# Altium PCB Flatcaster-pcb.PcbDoc (part 2 of 2)
Units mil, origin at the board's own origin, x right, y up, seen from the top; angles counter-clockwise.
Board outline 8267.72 x 2755.91 mil, 2 copper layers (Top Layer, Bottom Layer); 203 components, 114 nets, 596 pads, 141 vias.
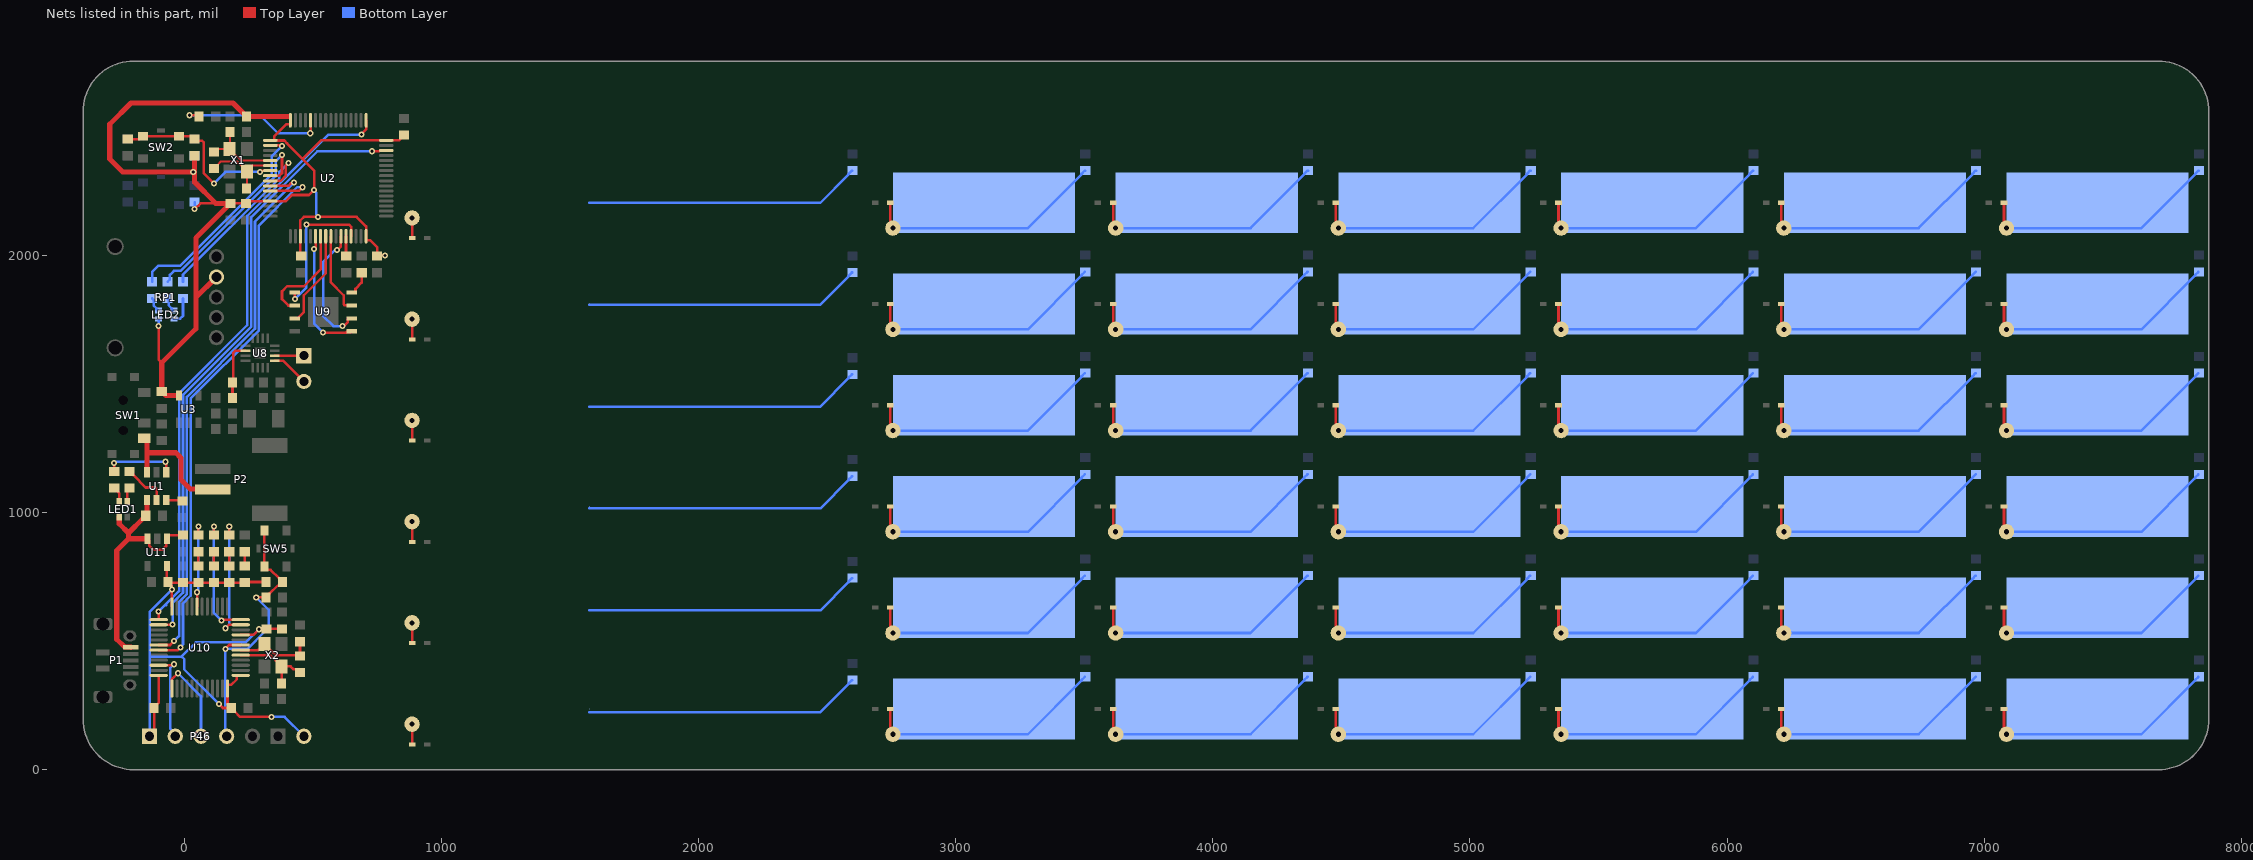
[diagram p2: the nets of this part, all layers, seen from the top]

## Via types
v1: diameter 23.62, hole 11.81, Top Layer to Bottom Layer, tented both sides, 141 vias

## Nets (pads, with @x,y where several pads share a name; then routed paths per layer and width w, separated by ;. In a path a pad name is that pad's centre, name@x,y a point inside that pad or via, vN(x,y) a via of type N, cw(c..) or ccw(c..) an arc to the next point about the centre after c; other vN are vias at no path point) (continued)
LED2_Link: D2.2 U10.11 | length 498.8
  Top Layer w10: v1(160,550) 173.58,563.58 U10.11@219.45,563.58 ; D2.2@175,912.48 v1(175,945)
  Bottom Layer w10: v1(160,550) 175,565 v1(175,945)
LED3_Link: D4.2 U10.12 | length 485.7
  Top Layer w10: D4.2@115,912.48 v1(115,945) ; v1(145,580) 148.69,580 151.95,583.27 U10.12@219.45,583.27
  Bottom Layer w10: v1(115,945) 115,610 v1(145,580)
LED4_Link: D5.2 U10.19 | length 345.2
  Top Layer w10: v1(50,690) 50,634.61 U10.19@50.16,634.45 ; D5.2@55,912.48 v1(55,945)
  Bottom Layer w10: v1(50,690) 55,695 v1(55,945)
LED_B: R22.2 U2.2 | length 833.1
  Top Layer w10: U2.2@334.61,2427.95 377.05,2427.95 v1(380,2425)
  Bottom Layer w10: R22.2@-125,1897.48 -125,1935 -100,1960 -15,1960 340,2315 340,2385 v1(380,2425)
LED_G: R21.2 U2.8 | length 811.8
  Top Layer w10: U2.8@334.61,2309.84 369.84,2309.84 380,2320 v1(380,2390)
  Bottom Layer w10: R21.2@-65,1897.48 -55.66,1906.82 -55.66,1924.34 -40,1940 -13.79,1940 355,2308.79 355,2365 v1(380,2390)
LED_R: R19.2 U2.9 | length 755.1
  Top Layer w10: U2.9@334.61,2290.16 375.16,2290.16 395,2310 395,2350 v1(405,2360)
  Bottom Layer w10: R19.2@-5,1897.48 -5,1925 370,2300 370,2325 v1(405,2360)
NetD1_1: D1.1 R26.1 | length 55
  Top Layer w10: R26.1@235,792.48 D1.1@235,847.52
NetD2_1: D2.1 R27.1 | length 55
  Top Layer w10: R27.1@175,792.48 D2.1@175,847.52
NetD3_1: D3.1 P3.1 pad.@1574.8,2204.72 R6.2 | length 1155.3
  Top Layer w10: D3.1@885.83,2066.93 P3.1@885.83,2145.67
  Bottom Layer w10: pad.@1574.8,2204.72 2473.43,2204.72 2583.74,2315.04 2583.74,2317.01 2596.46,2329.72 R6.2@2598.43,2329.72
NetD4_1: D4.1 R28.1 | length 55
  Top Layer w10: R28.1@115,792.48 D4.1@115,847.52
NetD5_1: D5.1 R29.1 | length 55
  Top Layer w10: R29.1@55,792.48 D5.1@55,847.52
NetD6_1: D6.1 P4.1 pad.@3110.24,2204.72 R7.2 | length 944.2
  Top Layer w10: D6.1@2746.06,2204.72 2746.06,2129.67 2755.91,2119.83 P4.1@2755.91,2106.3
  Bottom Layer w10: P4.1@2755.91,2106.3 3280.51,2106.3 3489.25,2315.04 3489.25,2317.01 3501.97,2329.72 R7.2@3503.94,2329.72
NetD7_1: D7.1 P5.1 pad.@3976.38,2204.72 R32.2 | length 944.2
  Top Layer w10: D7.1@3612.2,2204.72 3612.2,2129.67 3622.05,2119.83 P5.1@3622.05,2106.3
  Bottom Layer w10: P5.1@3622.05,2106.3 4146.65,2106.3 4355.39,2315.04 4355.39,2317.01 4368.11,2329.72 R32.2@4370.08,2329.72
NetD8_1: D8.1 P6.1 pad.@4842.52,2204.72 R33.2 | length 944.2
  Top Layer w10: D8.1@4478.35,2204.72 4478.35,2129.67 4488.19,2119.83 P6.1@4488.19,2106.3
  Bottom Layer w10: P6.1@4488.19,2106.3 5012.8,2106.3 5221.54,2315.04 5221.54,2317.01 5234.25,2329.72 R33.2@5236.22,2329.72
NetD9_1: D9.1 P7.1 pad.@5708.66,2204.72 R34.2 | length 944.2
  Top Layer w10: D9.1@5344.49,2204.72 5344.49,2129.67 5354.33,2119.83 P7.1@5354.33,2106.3
  Bottom Layer w10: P7.1@5354.33,2106.3 5878.94,2106.3 6087.68,2315.04 6087.68,2317.01 6100.39,2329.72 R34.2@6102.36,2329.72
NetD10_1: D10.1 P8.1 pad.@6574.8,2204.72 R35.2 | length 944.2
  Top Layer w10: D10.1@6210.63,2204.72 6210.63,2129.67 6220.47,2119.83 P8.1@6220.47,2106.3
  Bottom Layer w10: P8.1@6220.47,2106.3 6745.08,2106.3 6953.82,2315.04 6953.82,2317.01 6966.54,2329.72 R35.2@6968.5,2329.72
NetD11_1: D11.1 P9.1 pad.@7440.94,2204.72 R36.2 | length 944.2
  Top Layer w10: D11.1@7076.77,2204.72 7076.77,2129.67 7086.61,2119.83 P9.1@7086.61,2106.3
  Bottom Layer w10: P9.1@7086.61,2106.3 7611.22,2106.3 7819.96,2315.04 7819.96,2317.01 7832.68,2329.72 R36.2@7834.65,2329.72
NetD12_1: D12.1 P10.1 pad.@1574.8,1811.02 R37.2 | length 1155.3
  Top Layer w10: D12.1@885.83,1673.23 P10.1@885.83,1751.97
  Bottom Layer w10: 1574.8,1808.46 2473.43,1808.46 2583.74,1918.78 2583.74,1920.75 2596.46,1933.46 R37.2@2598.43,1933.46
NetD13_1: D13.1 P11.1 pad.@3110.24,1811.02 R38.2 | length 942.3
  Top Layer w10: D13.1@2746.06,1811.02 2746.06,1735.97 2755.91,1726.13 P11.1@2755.91,1712.6
  Bottom Layer w10: P11.1@2755.91,1712.6 3280.51,1712.6 3489.25,1921.34 3489.25,1923.31 R38.2@3501.97,1936.02
NetD14_1: D14.1 P12.1 pad.@3976.38,1811.02 R39.2 | length 942.3
  Top Layer w10: D14.1@3612.2,1811.02 3612.2,1735.97 3622.05,1726.13 P12.1@3622.05,1712.6
  Bottom Layer w10: P12.1@3622.05,1712.6 4146.65,1712.6 4355.39,1921.34 4355.39,1923.31 R39.2@4368.11,1936.02
NetD15_1: D15.1 P13.1 pad.@4842.52,1811.02 R40.2 | length 942.3
  Top Layer w10: D15.1@4478.35,1811.02 4478.35,1735.97 4488.19,1726.13 P13.1@4488.19,1712.6
  Bottom Layer w10: P13.1@4488.19,1712.6 5012.8,1712.6 5221.54,1921.34 5221.54,1923.31 R40.2@5234.25,1936.02
NetD16_1: D16.1 P14.1 pad.@5708.66,1811.02 R41.2 | length 942.3
  Top Layer w10: D16.1@5344.49,1811.02 5344.49,1735.97 5354.33,1726.13 P14.1@5354.33,1712.6
  Bottom Layer w10: P14.1@5354.33,1712.6 5878.94,1712.6 6087.68,1921.34 6087.68,1923.31 R41.2@6100.39,1936.02
NetD17_1: D17.1 P15.1 pad.@6574.8,1811.02 R42.2 | length 942.3
  Top Layer w10: D17.1@6210.63,1811.02 6210.63,1735.97 6220.47,1726.13 P15.1@6220.47,1712.6
  Bottom Layer w10: P15.1@6220.47,1712.6 6745.08,1712.6 6953.82,1921.34 6953.82,1923.31 R42.2@6966.54,1936.02
NetD18_1: D18.1 P16.1 pad.@7440.94,1811.02 R43.2 | length 942.3
  Top Layer w10: D18.1@7076.77,1811.02 7076.77,1735.97 7086.61,1726.13 P16.1@7086.61,1712.6
  Bottom Layer w10: P16.1@7086.61,1712.6 7611.22,1712.6 7819.96,1921.34 7819.96,1923.31 R43.2@7832.68,1936.02
NetD19_1: D19.1 P17.1 pad.@1574.8,1417.32 R44.2 | length 1155.3
  Top Layer w10: D19.1@885.83,1279.53 P17.1@885.83,1358.27
  Bottom Layer w10: 1574.8,1412.2 2473.43,1412.2 2583.74,1522.52 2583.74,1524.49 2596.46,1537.2 R44.2@2598.43,1537.2
NetD20_1: D20.1 P18.1 pad.@3110.24,1417.32 R45.2 | length 942.3
  Top Layer w10: D20.1@2746.06,1417.32 2746.06,1342.27 2755.91,1332.43 P18.1@2755.91,1318.9
  Bottom Layer w10: P18.1@2755.91,1318.9 3280.51,1318.9 3489.25,1527.64 3489.25,1529.61 R45.2@3501.97,1542.32
NetD21_1: D21.1 P19.1 pad.@3976.38,1417.32 R46.2 | length 942.3
  Top Layer w10: D21.1@3612.2,1417.32 3612.2,1342.27 3622.05,1332.43 P19.1@3622.05,1318.9
  Bottom Layer w10: P19.1@3622.05,1318.9 4146.65,1318.9 4355.39,1527.64 4355.39,1529.61 R46.2@4368.11,1542.32
NetD22_1: D22.1 P20.1 pad.@4842.52,1417.32 R47.2 | length 942.3
  Top Layer w10: D22.1@4478.35,1417.32 4478.35,1342.27 4488.19,1332.43 P20.1@4488.19,1318.9
  Bottom Layer w10: P20.1@4488.19,1318.9 5012.8,1318.9 5221.54,1527.64 5221.54,1529.61 R47.2@5234.25,1542.32
NetD23_1: D23.1 P21.1 pad.@5708.66,1417.32 R48.2 | length 942.3
  Top Layer w10: D23.1@5344.49,1417.32 5344.49,1342.27 5354.33,1332.43 P21.1@5354.33,1318.9
  Bottom Layer w10: P21.1@5354.33,1318.9 5878.94,1318.9 6087.68,1527.64 6087.68,1529.61 R48.2@6100.39,1542.32
NetD24_1: D24.1 P22.1 pad.@6574.8,1417.32 R49.2 | length 942.3
  Top Layer w10: D24.1@6210.63,1417.32 6210.63,1342.27 6220.47,1332.43 P22.1@6220.47,1318.9
  Bottom Layer w10: P22.1@6220.47,1318.9 6745.08,1318.9 6953.82,1527.64 6953.82,1529.61 R49.2@6966.54,1542.32
NetD25_1: D25.1 P23.1 pad.@7440.94,1417.32 R50.2 | length 942.3
  Top Layer w10: D25.1@7076.77,1417.32 7076.77,1342.27 7086.61,1332.43 P23.1@7086.61,1318.9
  Bottom Layer w10: P23.1@7086.61,1318.9 7611.22,1318.9 7819.96,1527.64 7819.96,1529.61 R50.2@7832.68,1542.32
NetD26_1: D26.1 P24.1 pad.@1574.8,1023.62 R51.2 | length 1155.3
  Top Layer w10: D26.1@885.83,885.83 P24.1@885.83,964.57
  Bottom Layer w10: 1574.8,1015.94 2473.43,1015.94 2583.74,1126.26 2583.74,1128.23 2596.46,1140.94 R51.2@2598.43,1140.94
NetD27_1: D27.1 P25.1 pad.@3110.24,1023.62 R52.2 | length 942.3
  Top Layer w10: D27.1@2746.06,1023.62 2746.06,948.57 2755.91,938.73 P25.1@2755.91,925.2
  Bottom Layer w10: P25.1@2755.91,925.2 3280.51,925.2 3489.25,1133.94 3489.25,1135.91 R52.2@3501.97,1148.62
NetD28_1: D28.1 P26.1 pad.@3976.38,1023.62 R53.2 | length 942.3
  Top Layer w10: D28.1@3612.2,1023.62 3612.2,948.57 3622.05,938.73 P26.1@3622.05,925.2
  Bottom Layer w10: P26.1@3622.05,925.2 4146.65,925.2 4355.39,1133.94 4355.39,1135.91 R53.2@4368.11,1148.62
NetD29_1: D29.1 P27.1 pad.@4842.52,1023.62 R54.2 | length 942.3
  Top Layer w10: D29.1@4478.35,1023.62 4478.35,948.57 4488.19,938.73 P27.1@4488.19,925.2
  Bottom Layer w10: P27.1@4488.19,925.2 5012.8,925.2 5221.54,1133.94 5221.54,1135.91 R54.2@5234.25,1148.62
NetD30_1: D30.1 P28.1 pad.@5708.66,1023.62 R55.2 | length 942.3
  Top Layer w10: D30.1@5344.49,1023.62 5344.49,948.57 5354.33,938.73 P28.1@5354.33,925.2
  Bottom Layer w10: P28.1@5354.33,925.2 5878.94,925.2 6087.68,1133.94 6087.68,1135.91 R55.2@6100.39,1148.62
NetD31_1: D31.1 P29.1 pad.@6574.8,1023.62 R56.2 | length 942.3
  Top Layer w10: D31.1@6210.63,1023.62 6210.63,948.57 6220.47,938.73 P29.1@6220.47,925.2
  Bottom Layer w10: P29.1@6220.47,925.2 6745.08,925.2 6953.82,1133.94 6953.82,1135.91 R56.2@6966.54,1148.62
NetD32_1: D32.1 P30.1 pad.@7440.94,1023.62 R57.2 | length 942.3
  Top Layer w10: D32.1@7076.77,1023.62 7076.77,948.57 7086.61,938.73 P30.1@7086.61,925.2
  Bottom Layer w10: P30.1@7086.61,925.2 7611.22,925.2 7819.96,1133.94 7819.96,1135.91 R57.2@7832.68,1148.62
NetD33_1: D33.1 P31.1 pad.@1574.8,629.92 R58.2 | length 1155.3
  Top Layer w10: D33.1@885.83,492.13 P31.1@885.83,570.87
  Bottom Layer w10: 1574.8,619.69 2473.43,619.69 2583.74,730 2583.74,731.97 2596.46,744.68 R58.2@2598.43,744.68
NetD34_1: D34.1 P32.1 pad.@3110.24,629.92 R59.2 | length 942.3
  Top Layer w10: D34.1@2746.06,629.92 2746.06,554.87 2755.91,545.03 P32.1@2755.91,531.5
  Bottom Layer w10: P32.1@2755.91,531.5 3280.51,531.5 3489.25,740.24 3489.25,742.2 R59.2@3501.97,754.92
NetD35_1: D35.1 P33.1 pad.@3976.38,629.92 R60.2 | length 942.3
  Top Layer w10: D35.1@3612.2,629.92 3612.2,554.87 3622.05,545.03 P33.1@3622.05,531.5
  Bottom Layer w10: P33.1@3622.05,531.5 4146.65,531.5 4355.39,740.24 4355.39,742.2 R60.2@4368.11,754.92
NetD36_1: D36.1 P34.1 pad.@4842.52,629.92 R61.2 | length 942.3
  Top Layer w10: D36.1@4478.35,629.92 4478.35,554.87 4488.19,545.03 P34.1@4488.19,531.5
  Bottom Layer w10: P34.1@4488.19,531.5 5012.8,531.5 5221.54,740.24 5221.54,742.2 R61.2@5234.25,754.92
NetD37_1: D37.1 P35.1 pad.@5708.66,629.92 R62.2 | length 942.3
  Top Layer w10: D37.1@5344.49,629.92 5344.49,554.87 5354.33,545.03 P35.1@5354.33,531.5
  Bottom Layer w10: P35.1@5354.33,531.5 5878.94,531.5 6087.68,740.24 6087.68,742.2 R62.2@6100.39,754.92
NetD38_1: D38.1 P36.1 pad.@6574.8,629.92 R63.2 | length 942.3
  Top Layer w10: D38.1@6210.63,629.92 6210.63,554.87 6220.47,545.03 P36.1@6220.47,531.5
  Bottom Layer w10: P36.1@6220.47,531.5 6745.08,531.5 6953.82,740.24 6953.82,742.2 R63.2@6966.54,754.92
NetD39_1: D39.1 P37.1 pad.@7440.94,629.92 R64.2 | length 942.3
  Top Layer w10: D39.1@7076.77,629.92 7076.77,554.87 7086.61,545.03 P37.1@7086.61,531.5
  Bottom Layer w10: P37.1@7086.61,531.5 7611.22,531.5 7819.96,740.24 7819.96,742.2 R64.2@7832.68,754.92
NetD40_1: D40.1 P38.1 pad.@1574.8,236.22 R65.2 | length 1155.3
  Top Layer w10: D40.1@885.83,98.43 P38.1@885.83,177.17
  Bottom Layer w10: 1574.8,223.43 2473.43,223.43 2583.74,333.74 2583.74,335.71 2596.46,348.43 R65.2@2598.43,348.43
NetD41_1: D41.1 P39.1 pad.@3110.24,236.22 R66.2 | length 942.3
  Top Layer w10: D41.1@2746.06,236.22 2746.06,161.17 2755.91,151.33 P39.1@2755.91,137.8
  Bottom Layer w10: P39.1@2755.91,137.8 3280.51,137.8 3489.25,346.54 3489.25,348.5 R66.2@3501.97,361.22
NetD42_1: D42.1 P40.1 pad.@3976.38,236.22 R67.2 | length 942.3
  Top Layer w10: D42.1@3612.2,236.22 3612.2,161.17 3622.05,151.33 P40.1@3622.05,137.8
  Bottom Layer w10: P40.1@3622.05,137.8 4146.65,137.8 4355.39,346.54 4355.39,348.5 R67.2@4368.11,361.22
NetD43_1: D43.1 P41.1 pad.@4842.52,236.22 R68.2 | length 942.3
  Top Layer w10: D43.1@4478.35,236.22 4478.35,161.17 4488.19,151.33 P41.1@4488.19,137.8
  Bottom Layer w10: P41.1@4488.19,137.8 5012.8,137.8 5221.54,346.54 5221.54,348.5 R68.2@5234.25,361.22
NetD44_1: D44.1 P42.1 pad.@5708.66,236.22 R69.2 | length 942.3
  Top Layer w10: D44.1@5344.49,236.22 5344.49,161.17 5354.33,151.33 P42.1@5354.33,137.8
  Bottom Layer w10: P42.1@5354.33,137.8 5878.94,137.8 6087.68,346.54 6087.68,348.5 R69.2@6100.39,361.22
NetD45_1: D45.1 P43.1 pad.@6574.8,236.22 R70.2 | length 942.3
  Top Layer w10: D45.1@6210.63,236.22 6210.63,161.17 6220.47,151.33 P43.1@6220.47,137.8
  Bottom Layer w10: P43.1@6220.47,137.8 6745.08,137.8 6953.82,346.54 6953.82,348.5 R70.2@6966.54,361.22
NetD46_1: D46.1 P44.1 pad.@7440.94,236.22 R71.2 | length 942.3
  Top Layer w10: D46.1@7076.77,236.22 7076.77,161.17 7086.61,151.33 P44.1@7086.61,137.8
  Bottom Layer w10: P44.1@7086.61,137.8 7611.22,137.8 7819.96,346.54 7819.96,348.5 R71.2@7832.68,361.22
NetLED1_1: LED1.1 R1.1 | length 62.1
  Top Layer w10: R1.1@-272.5,1095.02 -270.53,1095.02 -257.81,1082.3 -257.81,1080.33 -253.25,1075.77 LED1.1@-253.25,1042.03
NetLED1_2: LED1.2 R3.1 | length 56.8
  Top Layer w10: LED1.2@-221.75,1042.03 -221.75,1085.77 R3.1@-212.5,1095.02
NetLED2_1: LED2.1 R19.1 | length 107.4
  Bottom Layer w10: LED2.1@-40.47,1754.25 -15.75,1754.25 -5,1765 R19.1@-5,1832.52
NetLED2_2: LED2.2 R21.1 | length 58.7
  Bottom Layer w10: R21.1@-65,1832.52 -60.39,1827.91 -60.39,1805.66 -49.25,1794.53 -49.25,1791.57 -43.43,1785.75 LED2.2@-40.47,1785.75
NetLED2_3: LED2.3 R22.1 | length 59.1
  Bottom Layer w10: R22.1@-125,1832.52 -119.44,1826.96 -119.44,1805.66 -108.31,1794.53 -108.31,1791.57 -102.48,1785.75 LED2.3@-99.53,1785.75
NetR1_2: R1.2 U1.1 | length 276.5
  Top Layer w10: R1.2@-272.5,1159.98 v1(-272.5,1192.5) ; v1(-72.5,1197.5) -70.1,1195.1 U1.1@-70.1,1156.63
  Bottom Layer w10: v1(-272.5,1192.5) -267.5,1197.5 v1(-72.5,1197.5)
NetR2_1: R2.1 U1.6 | length 64
  Top Layer w10: U1.6@-70.1,1048.37 -10.89,1048.37 R2.1@-7.5,1044.98
NetR3_2: R3.2 U1.5 | length 177.7
  Top Layer w10: R3.2@-212.5,1159.98 -210.53,1159.98 -197.81,1147.26 -197.81,1145.3 -150.02,1097.5 -113.36,1097.5 -107.5,1091.64 U1.5@-107.5,1048.37
NetR8_2: R8.2 U2.28 | length 77.6
  Top Layer w10: U2.28@628.9,2074.61 628.9,1998.58 R8.2@630,1997.48
NetR9_2: R9.2 U2.60 | length 589.4
  Top Layer w10: v1(20,2545) 52.52,2545 R9.2@57.52,2540 ; v1(490,2475) 491.1,2476.1 U2.60@491.1,2525.39
  Bottom Layer w10: v1(20,2545) 295,2545 365,2475 v1(490,2475)
NetR16_2: R16.2 R17.2 U8.2 | length 228
  Top Layer w10: R17.2@187.48,1445 R17.2@187.48,1445 R16.2@187.52,1505 190,1507.48 190,1620 199.84,1629.84 U8.2@237.91,1629.84
NRST: C6.2 R5.2 SW2.1 U2.7 | length 725.8
  Top Layer w10: C6.2@-220,2452.48 -174.65,2452.48 -163.82,2463.31 SW2.1@-159.88,2463.31 SW2.1@-20.12,2463.31 29.17,2463.31 R5.2@40,2452.48 46.31,2446.17 68.83,2446.17 75,2440 75,2320 v1(115,2280) ; v1(295,2325) 299.53,2329.53 U2.7@334.61,2329.53
  Bottom Layer w10: v1(115,2280) 160,2325 v1(295,2325)
NRST_Link: C36.2 P46.4 R31.2 SW5.1 U10.7 | length 1115.5
  Top Layer w10: v1(160,470) 174.84,484.84 U10.7@219.45,484.84 ; v1(280,670) C36.2@317.52,670 317.52,671.97 330.24,684.69 332.2,684.69 362.83,715.31 369.76,715.31 382.48,728.03 R31.2@382.48,730 382.48,731.97 369.76,744.69 367.8,744.69 335.35,777.13 322.44,777.13 311.69,787.88 SW5.1@311.69,790.12 SW5.1@311.69,929.88
  Bottom Layer w10: P46.4@165,130 160,135 v1(160,470) 245.85,470 312.98,537.14 328.62,552.77 328.62,621.38 v1(280,670)
OSC_IN_Link: C27.2 R25.2 U10.5 X2.3 | length 322.8
  Top Layer w10: U10.5@219.45,445.47 219.8,445.13 250.6,445.13 250.73,445 335.16,445 355.91,424.25 359.84,424.25 378.46,405.63 X2.3@378.46,401.69 ; C27.2@377.48,335 378.46,335.98 X2.3@378.46,401.69 ; R25.2@440,377.52 440,385.55 435.31,390.24 425.31,390.24 423.35,392.2 422.8,392.2 413.31,401.69 X2.3@378.46,401.69
OSC_OUT_Link: C30.2 R25.1 U10.6 X2.1 | length 304.8
  Top Layer w10: U10.6@219.45,465.16 287.06,465.16 287.65,465.75 292.91,465.75 X2.1@311.54,484.37 ; X2.1@311.54,488.31 X2.1@311.54,484.37 ; R25.1@440,442.48 437.48,445 356.37,445 341.37,460 339.84,460 334.09,465.75 330.16,465.75 X2.1@311.54,484.37 ; R25.1@450,442.48 C30.2@450,497.52
OUTN: P45.1 U8.10 | length 113
  Top Layer w10: U8.10@352.09,1610.16 464.84,1610.16 P45.1@465,1610
OUTP: P45.2 U8.9 | length 146.2
  Top Layer w10: U8.9@352.09,1590.47 384.53,1590.47 P45.2@465,1510
QSPI_CS: U2.29 U9.1 | length 548
  Top Layer w10: U9.1@428.98,1855 430,1853.98 v1(430,1830) ; v1(475,2120) 640,2120 648.58,2111.42 U2.29@648.58,2074.61
  Bottom Layer w10: v1(430,1830) 475,1875 v1(475,2120)
QSPI_IO0: U2.22 U9.5 | length 504.6
  Top Layer w10: v1(505,2025) 510.79,2030.79 U2.22@510.79,2074.61 ; v1(540,1700) 629.5,1700 631.62,1702.13 648.15,1702.13 U9.5@651.02,1705
  Bottom Layer w10: v1(505,2025) 505,1735 v1(540,1700)
QSPI_IO1: U2.23 U9.2 | length 404.3
  Top Layer w10: U9.2@428.98,1805 405,1805 380,1830 380,1860 400,1880 465,1880 530.47,1945.47 U2.23@530.47,2074.61
QSPI_IO2: U2.24 U9.3 | length 377.3
  Top Layer w10: U9.3@428.98,1755 441.77,1755 444.65,1757.87 444.65,1758.67 465,1779.02 465,1845 550.16,1930.16 U2.24@550.16,2074.61
QSPI_IO3: U2.25 U9.7 | length 318.5
  Top Layer w10: U2.25@569.84,2074.61 569.84,1895.16 620,1845 620,1810 623.13,1806.87 649.16,1806.87 U9.7@651.02,1805
QSPI_SCK: U2.27 U9.6 | length 490.9
  Top Layer w10: v1(594.27,2020.23) 609.21,2035.17 U2.27@609.21,2074.61 ; v1(615.87,1725) 621.02,1725 636.15,1740.12 636.15,1752.13 639.02,1755 U9.6@651.02,1755
  Bottom Layer w10: v1(594.27,2020.23) 593.89,2020.61 585.61,2020.61 540,1975 540,1765 580,1725 v1(615.87,1725)
SWCLK: U2.49 U10.25 | length 2357.3
  Top Layer w10: v1(-100,615) -99.45,614.45 U10.25@-99.45,583.27 ; v1(690,2470) 690,2472.67 707.64,2490.31 U2.49@707.64,2525.39
  Bottom Layer w10: v1(-100,615) -75,640 ; -70,640 -75,640 ; v1(690,2470) 561.21,2470 245,2153.79 245,1728.64 -20,1463.64 -20,695 -75,640
SWCLK_Link: P46.3 U10.37 | length 351.4
  Top Layer w10: U10.37@-48.27,315.55 -47.92,315.9 -47.92,352.08 v1(-25,375)
  Bottom Layer w10: v1(-25,375) 65,285 P46.3@65,130
SWDIO: U2.46 U10.26 | length 2397.3
  Top Layer w10: U10.26@-99.45,563.58 -46.42,563.58 v1(-45,565) ; v1(730,2405) 759,2405 762.27,2408.27 U2.46@785.39,2408.27
  Bottom Layer w10: v1(-45,565) -45,648.79 -5,688.79 -5,1457.43 260,1722.43 260,2147.57 517.43,2405 v1(730,2405)
SWDIO_Link: P46.2 U10.34 | length 355.6
  Top Layer w10: U10.34@-99.45,406.1 -43.9,406.1 v1(-40,410)
  Bottom Layer w10: v1(-40,410) -55,395 -55,160.39 -35,140.39 P46.2@-35,130
UART8_RX: U2.11 U10.31 | length 2218.8
  Top Layer w10: U10.31@-99.45,465.16 -24.84,465.16 v1(-15,475) ; U2.11@334.61,2250.79 445.79,2250.79 v1(460,2265)
  Bottom Layer w10: v1(-15,475) -15,477.67 -5,487.67 -5,646.36 25,676.36 25,1443.79 290,1708.79 290,2115.86 439.14,2265 v1(460,2265)
UART8_TX: U2.10 U10.30 | length 2139.7
  Top Layer w10: U10.30@-99.45,484.84 -99.29,485 -55,485 v1(-40,500) ; U2.10@334.61,2270.47 405.47,2270.47 415.76,2280.76 424.03,2280.76 v1(426.64,2283.36)
  Bottom Layer w10: v1(-40,500) -20,520 -20,652.57 10,682.57 10,1450 275,1715 275,2131.73 v1(426.64,2283.36)
VBAT: P2.1 SW1.2 U1.3 | length 502.4
  Top Layer w20: SW1.2@-155.81,1288.92 -152.62,1288.92 -144.9,1281.2 -144.9,1232.5 ; U1.3@-144.9,1156.63 -144.9,1232.5 ; P2.1@110,1090 107.82,1092.18 22.82,1092.18 -12.5,1127.5 -12.5,1212.5 -32.5,1232.5 -144.9,1232.5
VBUS: C1.2 C28.2 LED1.4 P1.1 U1.4 U11.1 U11.3 | length 1022.9
  Top Layer w10: U11.3@-142.4,898.15 -136.42,892.17 -136.42,871.42 -120,855 -85,855 -70.68,869.32 -70.68,895.07 U11.1@-67.6,898.15 -67.6,905.67 -60.79,912.48 C28.2@-5,912.48
  Top Layer w20: LED1.4@-253.25,982.97 -252.7,982.43 -252.7,956.48 -216.85,920.63 ; P1.1@-207.83,476.18 -208.21,476.56 -231.56,476.56 -262.5,507.5 -262.5,852.5 -216.85,898.15 ; C1.2@-149.98,987.5 C1.2@-149.98,985.53 ; U1.4@-144.9,1048.37 -144.9,990.61 C1.2@-149.98,985.53 ; U11.3@-142.4,898.15 -216.85,898.15 ; -216.85,898.15 -216.85,920.63 ; -216.85,920.63 -159.67,977.81 -157.7,977.81 C1.2@-149.98,985.53
VCC: C4.2 C5.2 C7.2 C8.2 C9.2 C10.2 C12.2 LED2.4 R5.1 R23.1 R24.1 RP1.4 U2.1 U2.13 U2.19 U2.32 U2.48 U2.64 U3.5 | length 4814.3
  Top Layer w10: v1(-100,1725) -100,1595 -87.5,1582.5 ; v1(40,2180) 62.48,2202.48 122.52,2202.48 ; C5.2@180,2202.48 C4.2@240,2202.48 248.94,2211.42 U2.13@334.61,2211.42 395.2,2211.42 418.79,2235 485,2235 v1(505,2255) 505,2330 460,2375 ; U2.64@412.36,2525.39 412.36,2511.18 411.53,2510.35 397.31,2510.35 349.65,2462.69 349.65,2448.47 348.82,2447.64 U2.1@334.61,2447.64 334.95,2447.29 358.87,2447.29 359.35,2446.81 389.03,2446.81 400.42,2435.42 400.42,2434.58 460,2375 ; C7.2@457.48,1995 C7.2@455,1997.48 451.73,2000.75 U2.19@451.73,2074.61 451.73,2136.73 465,2150 v1(520,2150) 670,2150 707.64,2112.36 U2.32@707.64,2074.61 707.64,2060.4 708.47,2059.56 722.69,2059.56 750,2032.24 C8.2@750,1997.48 752.52,2000 v1(780,2000) ; C10.2@855,2467.52 853.03,2467.52 840.31,2454.8 840.31,2453.5 834.46,2447.64 U2.48@785.39,2447.64 532.64,2447.64 460,2375
  Top Layer w20: U3.5@-19.9,1455.65 -71.2,1455.65 -85.53,1469.98 C12.2@-87.5,1469.98 -87.5,1582.5 45,1715 45,1836.22 ; R5.1@40,2387.52 v1@40,2325 ; RP1.4@125,1916.22 45,1836.22 ; C5.2@180,2202.48 C5.2@178.03,2202.48 ; U2.64@408.27,2540 C9.2@242.48,2540 242.48,2541.97 234.76,2549.69 232.8,2549.69 189.79,2592.69 -207.31,2592.69 -290,2510 -290,2375 -240,2325 v1(35,2325) v1@40,2325 ; v1@40,2325 40,2285 122.52,2202.48 C5.2@178.03,2202.48 ; 45,1836.22 45,2067.48 170.31,2192.8 170.31,2194.76 C5.2@178.03,2202.48
  Bottom Layer w10: v1(-100,1725) -99.53,1725.47 LED2.4@-99.53,1754.25 ; v1(35,2325) 40,2330 R23.1@40,2387.52 ; v1(40,2180) R24.1@40,2207.52 ; v1(505,2255) 505,2251.31 512.5,2243.81 512.5,2161.19 520,2153.69 v1(520,2150)
VCC_Link: C29.2 C31.1 C32.1 C33.1 C34.1 C35.1 P46.1 P49.2 R26.2 R27.2 R28.2 R29.2 R31.1 U10.1 U10.9 U10.24 U10.36 U10.48 U11.5 | length 2887.3
  Top Layer w10: P46.1@-143.67,138.67 P46.1@-135,130 -117.48,147.52 C31.1@-117.48,240 -117.48,241.97 -99.45,260 U10.36@-99.45,366.73 -113.66,366.73 U10.36@-114.5,365.9 ; U11.5@-67.6,791.85 -67.6,735.08 C34.1@-62.52,730 ; U10.24@-48.27,634.45 v1(-48.27,700) ; v1(135,255) 150,240 C33.1@182.52,240 ; U10.1@219.45,366.73 205.24,366.73 204.4,365.9 204.4,351.68 183.32,330.6 169.1,330.6 168.27,329.76 U10.48@168.27,315.55 168.27,256.22 182.52,241.97 C33.1@182.52,240 ; U10.9@219.45,524.21 269.21,524.21 v1(291.17,546.17) 318.65,546.17 C32.1@320,547.52 C35.1@380,547.52 ; R31.1@317.52,730 237.48,730 R26.2@235,727.52 R27.2@175,727.52 R28.2@115,727.52 R29.2@55,727.52 -60.04,727.52 C34.1@-62.52,730 ; v1(340,205) 217.52,205 197.2,225.31 195.24,225.31 182.52,238.03 C33.1@182.52,240 ; C34.1@-62.52,730 -49.8,717.28 C34.1@-49.8,715.31 ; C34.1@-49.8,715.31 -48.27,713.78 v1(-48.27,700) ; C34.1@-49.8,715.31 -49.8,701.54 v1(-48.27,700)
  Bottom Layer w10: P46.1@-135,130 -135,440 ; v1(-48.27,700) -135,613.27 -135,440 ; v1(135,255) 0,390 0,430 -10,440 ; v1(291.17,546.17) 289.96,546.17 238.79,495 45,495 -10,440 ; v1(340,205) 390,205 P49.2@465,130 ; -135,440 -10,440
VCC_MCU: C24.2 U9.8 | length 100.7
  Top Layer w10: U9.8@651.02,1855 663.03,1855 665.9,1857.87 665.9,1869.88 690,1893.98 C24.2@690,1932.52
XTAL_IN: C2.2 R4.2 U2.5 X1.3 | length 311.9
  Top Layer w8: R4.2@115,2402.48 125.83,2413.31 X1.3@176.54,2413.31 ; C2.2@177.52,2480 177.52,2414.29 X1.3@176.54,2413.31 ; U2.5@334.61,2368.9 220.94,2368.9 200.09,2389.75 196.16,2389.75 176.54,2409.37 X1.3@176.54,2413.31
XTAL_OUT: C3.2 R4.1 U2.6 X1.1 | length 325.5
  Top Layer w8: R4.1@115,2337.52 116.97,2337.52 130.69,2351.24 130.69,2353.2 142.48,2365 205.16,2365 219.91,2350.25 223.84,2350.25 243.46,2330.63 X1.1@243.46,2329.59 ; C3.2@242.48,2260 243.46,2260.98 X1.1@243.46,2326.69 X1.1@243.46,2329.59 ; U2.6@334.61,2349.21 263.09,2349.21 X1.1@243.46,2329.59
pads on no net: LED1.3 P1.4 P2.0 RP1. RP1.2 RP1.5 SW1. SW1.3 SW2. SW3. SW4. SW5. U2.15 U2.16 U2.20 U2.21 U2.26 U2.30 U2.31 U2.45 U2.47 U2.50 U2.51 U2.52 U2.53 U2.54 U2.55 U2.56 U2.57 U3.4 U8.5 U8.6 U8.12 U8.13 U9.9 U10.2 U10.3 U10.4 U10.13 U10.14 U10.15 U10.16 U10.17 U10.18 U10.21 U10.22 U10.27 U10.28 U10.29 U10.38 U10.41 U10.42 U10.43 U10.45 U10.46 U11.4

## Polygon pours and split planes (outlines as drawn)
GND on Bottom Layer "GND_L02_P000" (solid, pour order 0): 7874.02,2755.91 7874.02,2421.26 415,2421.26 415,0 -393.7,0 -393.7,2755.91
GND on Bottom Layer "GND_L02_P002" (solid, pour order 2): 390,2260 510,2260 525,2245 525,2095 730,2095 775,2050 775,1895 505,1895 500,1890 500,1665 390,1665
GND on Top Layer "GND_L01_P001" (solid, pour order 1): 885.83,2755.91 885.83,2421.26 807.09,2342.52 551.18,2342.52 511.81,2303.15 511.81,2165.35 629.92,2047.24 787.4,2047.24 826.77,2007.87 826.77,1929.13 792.8,1895.16 569.84,1895.16 569.84,1888.74 393.7,1712.6 393.7,0 -393.7,0 -393.7,2755.91
GND on Top Layer "CAP_GND_L01_P003" (solid, pour order 3): 1279.53,2460.63 1279.53,78.74 7814.96,78.74 7814.96,2460.63

## Other copper
Top Layer:
  rectangle net +5: 230,1325 330,1460
  rectangle net +5: 300,1425 330,1580
Bottom Layer:
  region net NetD3_1: 2559.06,2066.93 1574.8,2145.67 590.55,2145.67 590.55,2263.78 1574.8,2263.78 2559.06,2342.52
  region net NetD12_1: 2559.06,1673.23 1574.8,1751.97 590.55,1751.97 590.55,1870.08 1574.8,1870.08 2559.06,1948.82
  region net NetD19_1: 2559.06,1279.53 1574.8,1358.27 590.55,1358.27 590.55,1476.38 1574.8,1476.38 2559.06,1555.12
  region net NetD26_1: 2559.06,885.83 1574.8,964.57 590.55,964.57 590.55,1082.68 1574.8,1082.68 2559.06,1161.42
  region net NetD33_1: 2559.06,492.13 1574.8,570.87 590.55,570.87 590.55,688.98 1574.8,688.98 2559.06,767.72
  region net NetD40_1: 2559.06,98.43 1574.8,177.17 590.55,177.17 590.55,295.28 1574.8,295.28 2559.06,374.02

## Silkscreen, mask and mechanical layers (free items; w line width, h text height)
Top Overlay:
  text "-" at 525.01,1640 h60 r270
  text "+" at 525,1520 h60 r270
  text "-" at 40.01,1255 h60 r270
  text "+" at 42.23,1059.72 h60 r270
Bottom Overlay:
  lines w10: 551.18,0 551.18,2401.57 7874.02,2401.57 ; 551.18,433.07 7874.02,433.07 ; 551.18,826.77 7874.02,826.77 ; 551.18,1220.47 7874.02,1220.47 ; 551.18,1614.17 7874.02,1614.17 ; 551.18,2007.87 7874.02,2007.87 ; 2677.17,0 2677.17,2401.57 ; 3543.31,0 3543.31,2401.57 ; 4409.45,0 4409.45,2401.57 ; 5275.59,0 5275.59,2401.57 ; 6141.73,0 6141.73,2401.57 ; 7007.87,0 7007.87,2401.57
  text "A" at -330,2405 h60 r270
  text "B" at -330,2225 h60 r270
  text "-Vol+" at -335,1710 h60 r270
  text "ON-OFF" at -335,1215 h60 r270
  text "V 0.1" at -175,805 h60 r270
  text "CFRPG" at -285,790 h60 r270
  text "Flatcaster" at -60,660 h60 r270
Mechanical 1:
  the board outline again, w10